# Altium PCB LedMatrix.PcbDoc (part 1 of 3)
Units mm, origin at the board's own origin, x right, y up, seen from the top; angles counter-clockwise.
Board outline 35.93 x 53 mm, 2 copper layers (Top Layer, Bottom Layer), stack 1.611 mm thick; 215 components, 212 nets, 670 pads, 259 vias.
Unrouted connection lines stored in the file: 107.
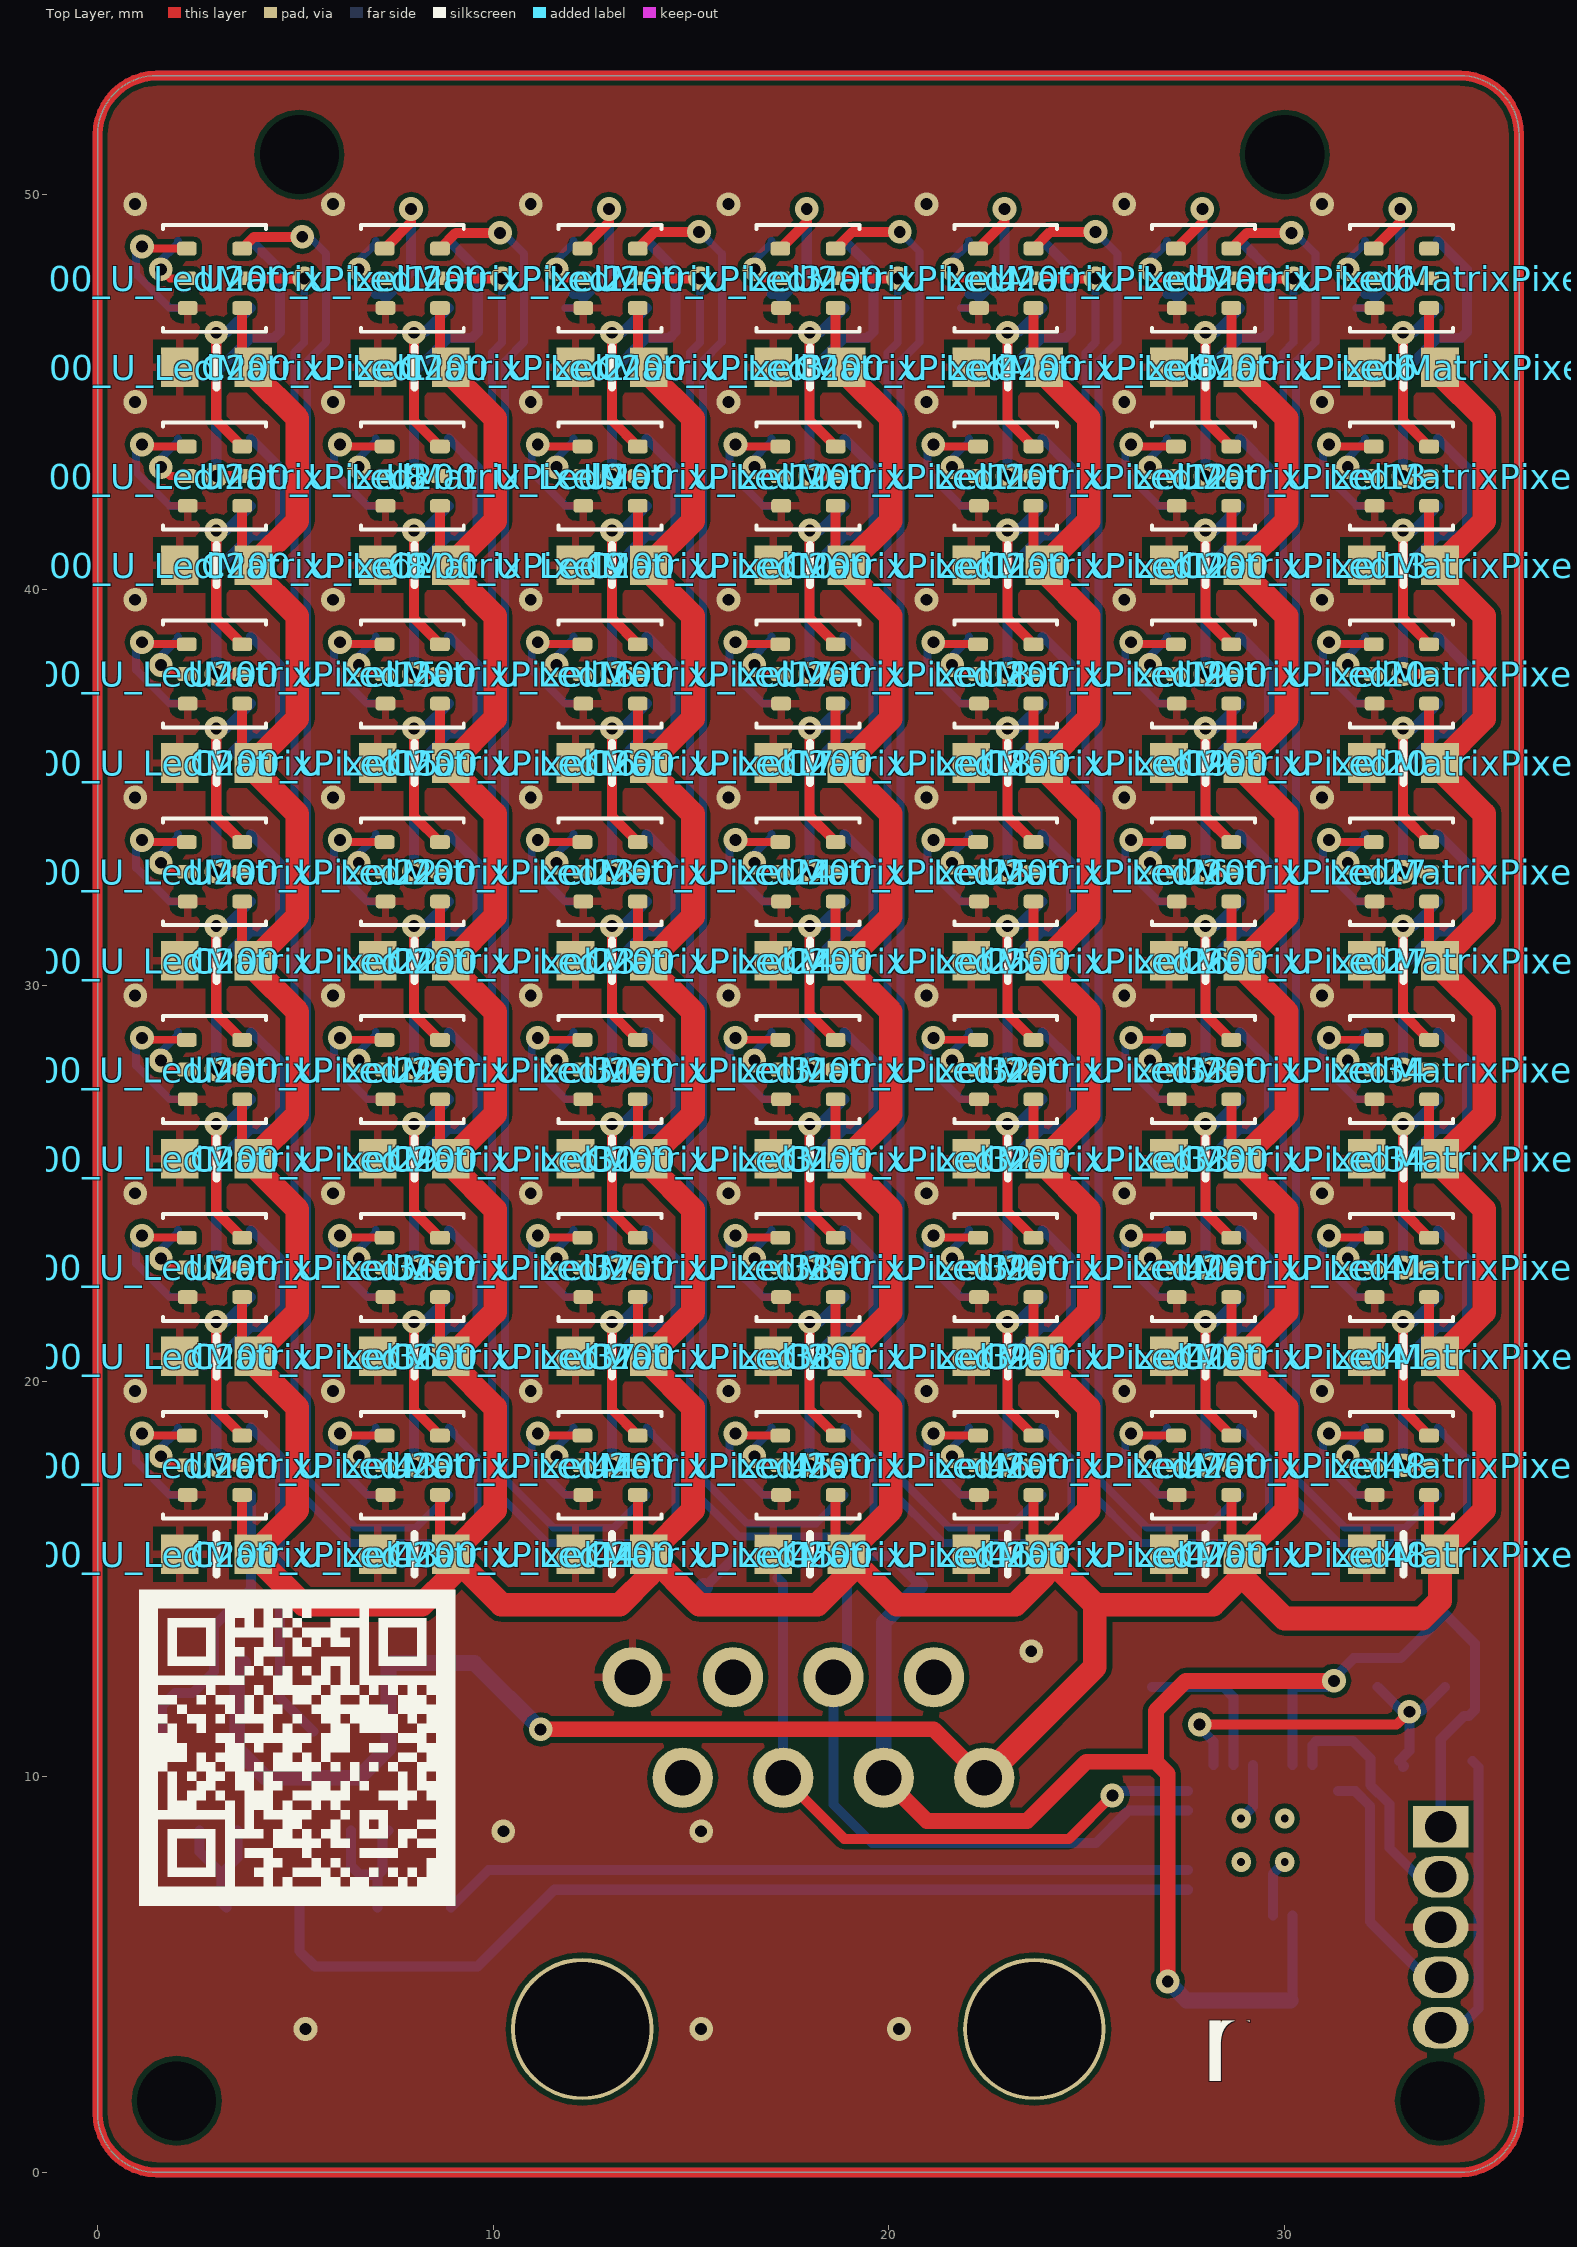
[diagram p0: Top Layer view]
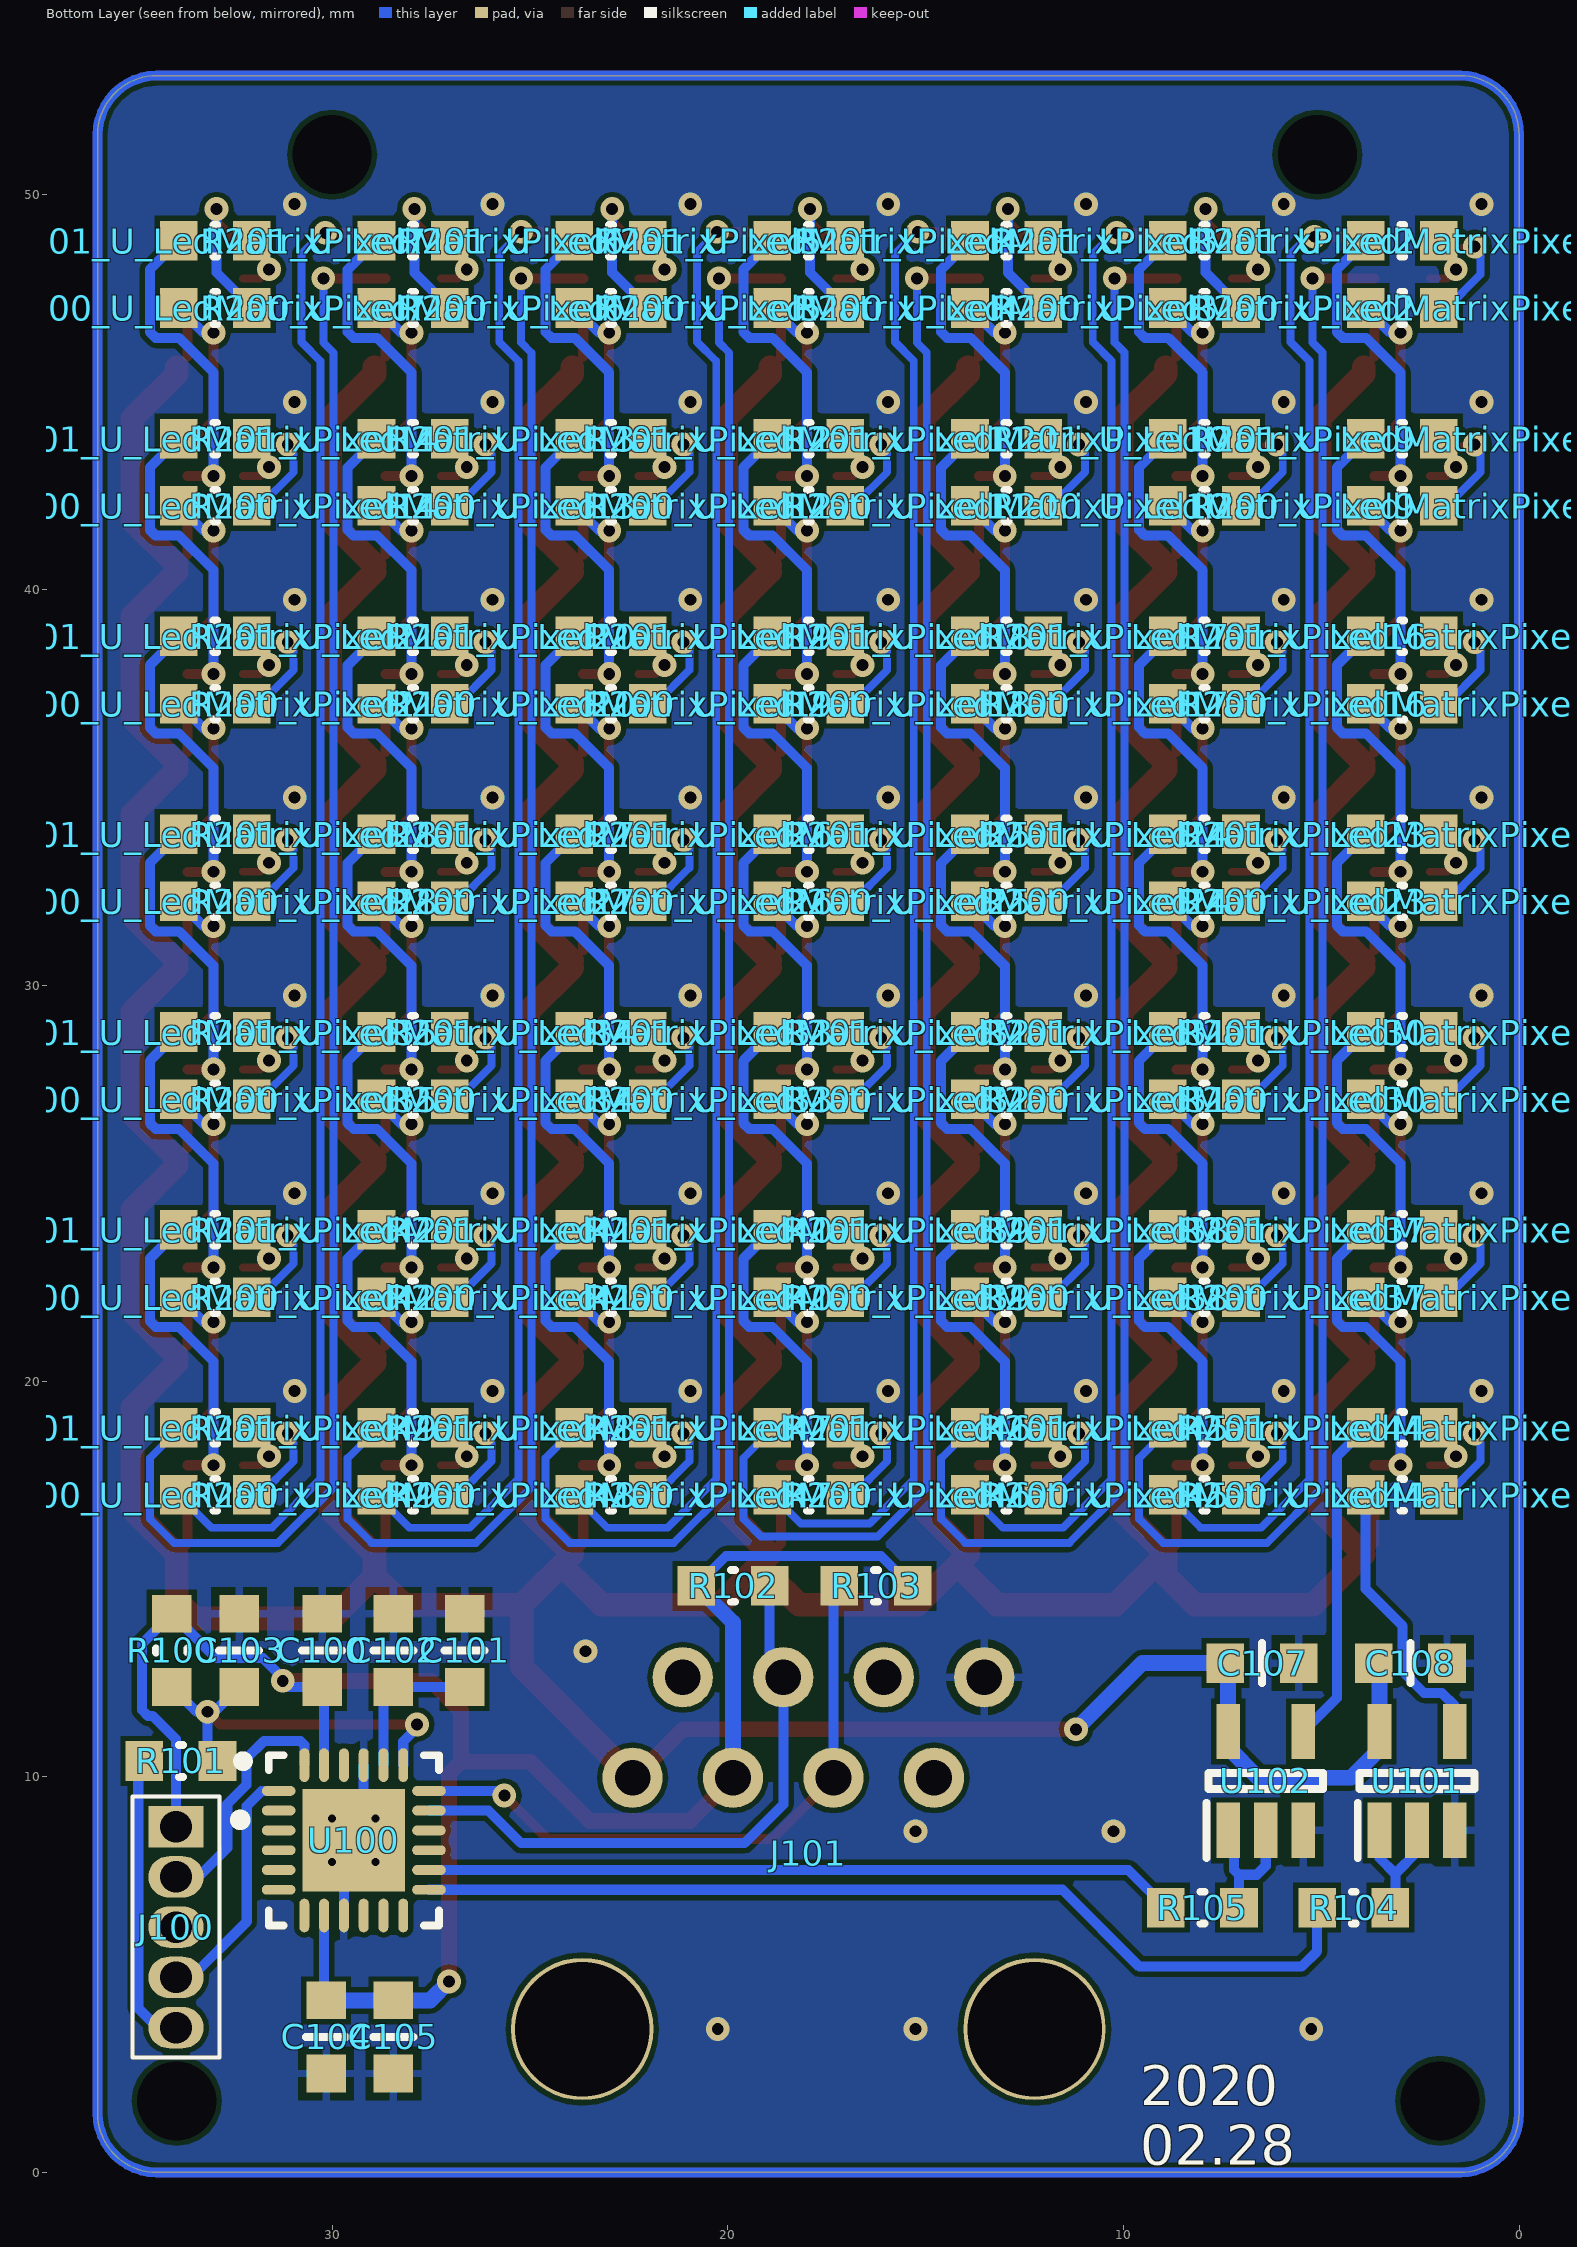
[diagram p1: Bottom Layer view, seen from below]

## Layer stack, top to bottom
Top Solder: solder mask 0.0102, Solder Resist, Dk 3.5
Top Layer: signal copper 0.0356
Dielectric 1: dielectric 1.54, FR-4, Dk 4.8
Bottom Layer: signal copper 0.0356
Bottom Solder: solder mask 0.0102, Solder Resist, Dk 3.5

## Board outline
0,1.5 ccw(c1.5,1.5) 1.5,0 34.407,0 34.432,0 ccw(c34.432,1.5) 35.933,1.5 35.931,1.5 35.931,51.5 ccw(c34.431,51.5) 34.431,53 34.425,53 1.5,53 ccw(c1.5,51.5) 0,51.5

## Design rules (kind name [scope] priority, off if disabled: settings)
Clearance [All] p1: gap=0.127 ignorepadtopadclearanceinfootprint=FALSE
PolygonConnect PolygonConnect_1 [All vs IsVia] p1: connectstyle=Direct reliefconductorwidth=0.254 reliefentries=4 polygonreliefangle="90 Angle" airgapwidth=0.254
PolygonConnect [All] p2: connectstyle=Relief reliefconductorwidth=0.2 reliefentries=4 polygonreliefangle="90 Angle" airgapwidth=0.2
RoutingVias [All] p1: holewidth=0.3 width=0.6 viastyle="Through Hole" minholewidth=0.3 minwidth=0.6 maxholewidth=2 maxwidth=2.5
SolderMaskExpansion [All] p1: expansion=0.102
Width [All] p1: maxlimit=12.7 minlimit=0.127 preferedwidth=0.254
30 further rules are at their usual default settings.

## Classes and differential pairs
channel class LedMatrixPixel: U_LedMatrixPixel1 U_LedMatrixPixel2 U_LedMatrixPixel3 U_LedMatrixPixel4 U_LedMatrixPixel5 U_LedMatrixPixel6 U_LedMatrixPixel7 U_LedMatrixPixel8 U_LedMatrixPixel9 U_LedMatrixPixel10 U_LedMatrixPixel11 U_LedMatrixPixel12 U_LedMatrixPixel13 U_LedMatrixPixel14 U_LedMatrixPixel15 U_LedMatrixPixel16 U_LedMatrixPixel17 U_LedMatrixPixel18 U_LedMatrixPixel19 U_LedMatrixPixel20 U_LedMatrixPixel21 U_LedMatrixPixel22 U_LedMatrixPixel23 U_LedMatrixPixel24 U_LedMatrixPixel25 U_LedMatrixPixel26 U_LedMatrixPixel27 U_LedMatrixPixel28 U_LedMatrixPixel29 U_LedMatrixPixel30 U_LedMatrixPixel31 U_LedMatrixPixel32 U_LedMatrixPixel33 U_LedMatrixPixel34 U_LedMatrixPixel35 U_LedMatrixPixel36 U_LedMatrixPixel37 U_LedMatrixPixel38 U_LedMatrixPixel39 U_LedMatrixPixel40 U_LedMatrixPixel41 U_LedMatrixPixel42 U_LedMatrixPixel43 U_LedMatrixPixel44 U_LedMatrixPixel45 U_LedMatrixPixel46 U_LedMatrixPixel47 U_LedMatrixPixel48 U_LedMatrixPixel49 U_LedMatrixPixel50 U_LedMatrixPixel51 U_LedMatrixPixel52 U_LedMatrixPixel54 U_LedMatrixPixel55 U_LedMatrixPixel56 U_LedMatrixPixel57 U_LedMatrixPixel58 U_LedMatrixPixel59 U_LedMatrixPixel60 U_LedMatrixPixel61 U_LedMatrixPixel63 U_LedMatrixPixel64
component class U_LedMatrixPixel48: C200_U_LedMatrixPixel48 R200_U_LedMatrixPixel48 R201_U_LedMatrixPixel48 U200_U_LedMatrixPixel48
component class U_LedMatrixPixel40: C200_U_LedMatrixPixel40 R200_U_LedMatrixPixel40 R201_U_LedMatrixPixel40 U200_U_LedMatrixPixel40
component class U_LedMatrixPixel49: C200_U_LedMatrixPixel49 R200_U_LedMatrixPixel49 R201_U_LedMatrixPixel49 U200_U_LedMatrixPixel49
component class U_LedMatrixPixel47: C200_U_LedMatrixPixel47 R200_U_LedMatrixPixel47 R201_U_LedMatrixPixel47 U200_U_LedMatrixPixel47
component class U_LedMatrixPixel46: C200_U_LedMatrixPixel46 R200_U_LedMatrixPixel46 R201_U_LedMatrixPixel46 U200_U_LedMatrixPixel46
component class U_LedMatrixPixel45: C200_U_LedMatrixPixel45 R200_U_LedMatrixPixel45 R201_U_LedMatrixPixel45 U200_U_LedMatrixPixel45
component class U_LedMatrixPixel44: C200_U_LedMatrixPixel44 R200_U_LedMatrixPixel44 R201_U_LedMatrixPixel44 U200_U_LedMatrixPixel44
component class U_LedMatrixPixel43: C200_U_LedMatrixPixel43 R200_U_LedMatrixPixel43 R201_U_LedMatrixPixel43 U200_U_LedMatrixPixel43
component class U_LedMatrixPixel42: C200_U_LedMatrixPixel42 R200_U_LedMatrixPixel42 R201_U_LedMatrixPixel42 U200_U_LedMatrixPixel42
component class U_LedMatrixPixel41: C200_U_LedMatrixPixel41 R200_U_LedMatrixPixel41 R201_U_LedMatrixPixel41 U200_U_LedMatrixPixel41
component class U_LedMatrixPixel39: C200_U_LedMatrixPixel39 R200_U_LedMatrixPixel39 R201_U_LedMatrixPixel39 U200_U_LedMatrixPixel39
component class U_LedMatrixPixel38: C200_U_LedMatrixPixel38 R200_U_LedMatrixPixel38 R201_U_LedMatrixPixel38 U200_U_LedMatrixPixel38
component class U_LedMatrixPixel37: C200_U_LedMatrixPixel37 R200_U_LedMatrixPixel37 R201_U_LedMatrixPixel37 U200_U_LedMatrixPixel37
component class U_LedMatrixPixel36: C200_U_LedMatrixPixel36 R200_U_LedMatrixPixel36 R201_U_LedMatrixPixel36 U200_U_LedMatrixPixel36
component class U_LedMatrixPixel35: C200_U_LedMatrixPixel35 R200_U_LedMatrixPixel35 R201_U_LedMatrixPixel35 U200_U_LedMatrixPixel35
component class U_LedMatrixPixel34: C200_U_LedMatrixPixel34 R200_U_LedMatrixPixel34 R201_U_LedMatrixPixel34 U200_U_LedMatrixPixel34
component class U_LedMatrixPixel33: C200_U_LedMatrixPixel33 R200_U_LedMatrixPixel33 R201_U_LedMatrixPixel33 U200_U_LedMatrixPixel33
component class U_LedMatrixPixel32: C200_U_LedMatrixPixel32 R200_U_LedMatrixPixel32 R201_U_LedMatrixPixel32 U200_U_LedMatrixPixel32
component class U_LedMatrixPixel31: C200_U_LedMatrixPixel31 R200_U_LedMatrixPixel31 R201_U_LedMatrixPixel31 U200_U_LedMatrixPixel31
component class U_LedMatrixPixel30: C200_U_LedMatrixPixel30 R200_U_LedMatrixPixel30 R201_U_LedMatrixPixel30 U200_U_LedMatrixPixel30
component class U_LedMatrixPixel29: C200_U_LedMatrixPixel29 R200_U_LedMatrixPixel29 R201_U_LedMatrixPixel29 U200_U_LedMatrixPixel29
component class U_LedMatrixPixel28: C200_U_LedMatrixPixel28 R200_U_LedMatrixPixel28 R201_U_LedMatrixPixel28 U200_U_LedMatrixPixel28
component class U_LedMatrixPixel27: C200_U_LedMatrixPixel27 R200_U_LedMatrixPixel27 R201_U_LedMatrixPixel27 U200_U_LedMatrixPixel27
component class U_LedMatrixPixel26: C200_U_LedMatrixPixel26 R200_U_LedMatrixPixel26 R201_U_LedMatrixPixel26 U200_U_LedMatrixPixel26
component class U_LedMatrixPixel25: C200_U_LedMatrixPixel25 R200_U_LedMatrixPixel25 R201_U_LedMatrixPixel25 U200_U_LedMatrixPixel25
component class U_LedMatrixPixel24: C200_U_LedMatrixPixel24 R200_U_LedMatrixPixel24 R201_U_LedMatrixPixel24 U200_U_LedMatrixPixel24
component class U_LedMatrixPixel23: C200_U_LedMatrixPixel23 R200_U_LedMatrixPixel23 R201_U_LedMatrixPixel23 U200_U_LedMatrixPixel23
component class U_LedMatrixPixel22: C200_U_LedMatrixPixel22 R200_U_LedMatrixPixel22 R201_U_LedMatrixPixel22 U200_U_LedMatrixPixel22
component class U_LedMatrixPixel21: C200_U_LedMatrixPixel21 R200_U_LedMatrixPixel21 R201_U_LedMatrixPixel21 U200_U_LedMatrixPixel21
component class U_LedMatrixPixel20: C200_U_LedMatrixPixel20 R200_U_LedMatrixPixel20 R201_U_LedMatrixPixel20 U200_U_LedMatrixPixel20
component class U_LedMatrixPixel19: C200_U_LedMatrixPixel19 R200_U_LedMatrixPixel19 R201_U_LedMatrixPixel19 U200_U_LedMatrixPixel19
component class U_LedMatrixPixel18: C200_U_LedMatrixPixel18 R200_U_LedMatrixPixel18 R201_U_LedMatrixPixel18 U200_U_LedMatrixPixel18
component class U_LedMatrixPixel17: C200_U_LedMatrixPixel17 R200_U_LedMatrixPixel17 R201_U_LedMatrixPixel17 U200_U_LedMatrixPixel17
component class U_LedMatrixPixel16: C200_U_LedMatrixPixel16 R200_U_LedMatrixPixel16 R201_U_LedMatrixPixel16 U200_U_LedMatrixPixel16
component class U_LedMatrixPixel15: C200_U_LedMatrixPixel15 R200_U_LedMatrixPixel15 R201_U_LedMatrixPixel15 U200_U_LedMatrixPixel15
component class U_LedMatrixPixel14: C200_U_LedMatrixPixel14 R200_U_LedMatrixPixel14 R201_U_LedMatrixPixel14 U200_U_LedMatrixPixel14
component class U_LedMatrixPixel13: C200_U_LedMatrixPixel13 R200_U_LedMatrixPixel13 R201_U_LedMatrixPixel13 U200_U_LedMatrixPixel13
component class U_LedMatrixPixel12: C200_U_LedMatrixPixel12 R200_U_LedMatrixPixel12 R201_U_LedMatrixPixel12 U200_U_LedMatrixPixel12
component class U_LedMatrixPixel11: C200_U_LedMatrixPixel11 R200_U_LedMatrixPixel11 R201_U_LedMatrixPixel11 U200_U_LedMatrixPixel11
component class U_LedMatrixPixel10: C200_U_LedMatrixPixel10 R200_U_LedMatrixPixel10 R201_U_LedMatrixPixel10 U200_U_LedMatrixPixel10
component class U_LedMatrixPixel9: C200_U_LedMatrixPixel9 R200_U_LedMatrixPixel9 R201_U_LedMatrixPixel9 U200_U_LedMatrixPixel9
component class U_LedMatrixPixel8: C200_U_LedMatrixPixel8 R200_U_LedMatrixPixel8 R201_U_LedMatrixPixel8 U200_U_LedMatrixPixel8
component class U_LedMatrixPixel7: C200_U_LedMatrixPixel7 R200_U_LedMatrixPixel7 R201_U_LedMatrixPixel7 U200_U_LedMatrixPixel7
component class U_LedMatrixPixel6: C200_U_LedMatrixPixel6 R200_U_LedMatrixPixel6 R201_U_LedMatrixPixel6 U200_U_LedMatrixPixel6
component class U_LedMatrixPixel5: C200_U_LedMatrixPixel5 R200_U_LedMatrixPixel5 R201_U_LedMatrixPixel5 U200_U_LedMatrixPixel5
component class U_LedMatrixPixel4: C200_U_LedMatrixPixel4 R200_U_LedMatrixPixel4 R201_U_LedMatrixPixel4 U200_U_LedMatrixPixel4
component class U_LedMatrixPixel3: C200_U_LedMatrixPixel3 R200_U_LedMatrixPixel3 R201_U_LedMatrixPixel3 U200_U_LedMatrixPixel3
component class U_LedMatrixPixel2: C200_U_LedMatrixPixel2 R200_U_LedMatrixPixel2 R201_U_LedMatrixPixel2 U200_U_LedMatrixPixel2
component class U_LedMatrixPixel1: C200_U_LedMatrixPixel1 R200_U_LedMatrixPixel1 R201_U_LedMatrixPixel1 U200_U_LedMatrixPixel1
component class LedMatrixMain: C100 C101 C102 C103 C104 C105 C107 C108 J100 J101 R100 R101 R102 R103 R104 R105 U100 U101 U102

## Components (designator, comment, footprint, x,y, rotation, side; value= is the part's Value field where it differs from the comment)
C100 "100nF" CAP1608X06M 30.256,13.195 r270 bottom
C101 "100nF" CAP1608X06M 26.656,13.195 r270 bottom
C102 "1uF" CAP1608X06M 28.456,13.195 r270 bottom
C103 "100nF" CAP1608X06M 32.356,13.195 r270 bottom
C104 "100nF" CAP1608X06M 30.156,3.425 r90 bottom
C105 "10uF" CAP1608X06M 28.456,3.425 r90 bottom
C107 "100nF" CAP1608X06M 6.5,12.875 r0 bottom
C108 "100nF" CAP1608X06M 2.75,12.875 r0 bottom
C200_U_LedMatrixPixel1 "100nF" CAP1608X06M 3.006,45.625 r0 top (schematic designator C200)
C200_U_LedMatrixPixel2 "100nF" CAP1608X06M 8.006,45.625 r0 top (schematic designator C200)
C200_U_LedMatrixPixel3 "100nF" CAP1608X06M 13.006,45.625 r0 top (schematic designator C200)
C200_U_LedMatrixPixel4 "100nF" CAP1608X06M 18.006,45.625 r0 top (schematic designator C200)
C200_U_LedMatrixPixel5 "100nF" CAP1608X06M 23.006,45.625 r0 top (schematic designator C200)
C200_U_LedMatrixPixel6 "100nF" CAP1608X06M 28.006,45.625 r0 top (schematic designator C200)
C200_U_LedMatrixPixel7 "100nF" CAP1608X06M 33.006,45.625 r0 top (schematic designator C200)
C200_U_LedMatrixPixel8 "100nF" CAP1608X06M 3.006,40.625 r0 top (schematic designator C200)
C200_U_LedMatrixPixel9 "100nF" CAP1608X06M 8.006,40.625 r0 top (schematic designator C200)
C200_U_LedMatrixPixel10 "100nF" CAP1608X06M 13.006,40.625 r0 top (schematic designator C200)
C200_U_LedMatrixPixel11 "100nF" CAP1608X06M 18.006,40.625 r0 top (schematic designator C200)
C200_U_LedMatrixPixel12 "100nF" CAP1608X06M 23.006,40.625 r0 top (schematic designator C200)
C200_U_LedMatrixPixel13 "100nF" CAP1608X06M 28.006,40.625 r0 top (schematic designator C200)
C200_U_LedMatrixPixel14 "100nF" CAP1608X06M 33.006,40.625 r0 top (schematic designator C200)
C200_U_LedMatrixPixel15 "100nF" CAP1608X06M 3.006,35.625 r0 top (schematic designator C200)
C200_U_LedMatrixPixel16 "100nF" CAP1608X06M 8.006,35.625 r0 top (schematic designator C200)
C200_U_LedMatrixPixel17 "100nF" CAP1608X06M 13.006,35.625 r0 top (schematic designator C200)
C200_U_LedMatrixPixel18 "100nF" CAP1608X06M 18.006,35.625 r0 top (schematic designator C200)
C200_U_LedMatrixPixel19 "100nF" CAP1608X06M 23.006,35.625 r0 top (schematic designator C200)
C200_U_LedMatrixPixel20 "100nF" CAP1608X06M 28.006,35.625 r0 top (schematic designator C200)
C200_U_LedMatrixPixel21 "100nF" CAP1608X06M 33.006,35.625 r0 top (schematic designator C200)
C200_U_LedMatrixPixel22 "100nF" CAP1608X06M 3.006,30.625 r0 top (schematic designator C200)
C200_U_LedMatrixPixel23 "100nF" CAP1608X06M 8.006,30.625 r0 top (schematic designator C200)
C200_U_LedMatrixPixel24 "100nF" CAP1608X06M 13.006,30.625 r0 top (schematic designator C200)
C200_U_LedMatrixPixel25 "100nF" CAP1608X06M 18.006,30.625 r0 top (schematic designator C200)
C200_U_LedMatrixPixel26 "100nF" CAP1608X06M 23.006,30.625 r0 top (schematic designator C200)
C200_U_LedMatrixPixel27 "100nF" CAP1608X06M 28.006,30.625 r0 top (schematic designator C200)
C200_U_LedMatrixPixel28 "100nF" CAP1608X06M 33.006,30.625 r0 top (schematic designator C200)
C200_U_LedMatrixPixel29 "100nF" CAP1608X06M 3.006,25.625 r0 top (schematic designator C200)
C200_U_LedMatrixPixel30 "100nF" CAP1608X06M 8.006,25.625 r0 top (schematic designator C200)
C200_U_LedMatrixPixel31 "100nF" CAP1608X06M 13.006,25.625 r0 top (schematic designator C200)
C200_U_LedMatrixPixel32 "100nF" CAP1608X06M 18.006,25.625 r0 top (schematic designator C200)
C200_U_LedMatrixPixel33 "100nF" CAP1608X06M 23.006,25.625 r0 top (schematic designator C200)
C200_U_LedMatrixPixel34 "100nF" CAP1608X06M 28.006,25.625 r0 top (schematic designator C200)
C200_U_LedMatrixPixel35 "100nF" CAP1608X06M 33.006,25.625 r0 top (schematic designator C200)
C200_U_LedMatrixPixel36 "100nF" CAP1608X06M 3.006,20.625 r0 top (schematic designator C200)
C200_U_LedMatrixPixel37 "100nF" CAP1608X06M 8.006,20.625 r0 top (schematic designator C200)
C200_U_LedMatrixPixel38 "100nF" CAP1608X06M 13.006,20.625 r0 top (schematic designator C200)
C200_U_LedMatrixPixel39 "100nF" CAP1608X06M 18.006,20.625 r0 top (schematic designator C200)
C200_U_LedMatrixPixel40 "100nF" CAP1608X06M 23.006,20.625 r0 top (schematic designator C200)
C200_U_LedMatrixPixel41 "100nF" CAP1608X06M 28.006,20.625 r0 top (schematic designator C200)
C200_U_LedMatrixPixel42 "100nF" CAP1608X06M 33.006,20.625 r0 top (schematic designator C200)
C200_U_LedMatrixPixel43 "100nF" CAP1608X06M 3.006,15.625 r0 top (schematic designator C200)
C200_U_LedMatrixPixel44 "100nF" CAP1608X06M 8.006,15.625 r0 top (schematic designator C200)
C200_U_LedMatrixPixel45 "100nF" CAP1608X06M 13.006,15.625 r0 top (schematic designator C200)
C200_U_LedMatrixPixel46 "100nF" CAP1608X06M 18.006,15.625 r0 top (schematic designator C200)
C200_U_LedMatrixPixel47 "100nF" CAP1608X06M 23.006,15.625 r0 top (schematic designator C200)
C200_U_LedMatrixPixel48 "100nF" CAP1608X06M 28.006,15.625 r0 top (schematic designator C200)
C200_U_LedMatrixPixel49 "100nF" CAP1608X06M 33.006,15.625 r0 top (schematic designator C200)
J100 "SWD" Sullins_GRPB051VWVN-RC 33.95,6.2 r270 bottom
J101 "RJ45-8P8C-S" RJ45-8P8C 22.41,9.975 r180 bottom
R100 "10K" RESC1608X06M 34.056,13.195 r90 bottom
R101 "100" RESC1608X06M 33.825,10.4 r180 bottom
R102 "10K" RESC1608X06M 19.87,14.825 r0 bottom
R103 "10K" RESC1608X06M 16.256,14.825 r180 bottom
R104 "100" RESC1608X06M 4.181,6.695 r180 bottom
R105 "100" RESC1608X06M 8.006,6.695 r180 bottom
R200_U_LedMatrixPixel1 "100" RESC1608X06M 2.956,47.125 r180 bottom (schematic designator R200)
R200_U_LedMatrixPixel2 "100" RESC1608X06M 7.956,47.125 r180 bottom (schematic designator R200)
R200_U_LedMatrixPixel3 "100" RESC1608X06M 12.956,47.125 r180 bottom (schematic designator R200)
R200_U_LedMatrixPixel4 "100" RESC1608X06M 17.956,47.125 r180 bottom (schematic designator R200)
R200_U_LedMatrixPixel5 "100" RESC1608X06M 22.956,47.125 r180 bottom (schematic designator R200)
R200_U_LedMatrixPixel6 "100" RESC1608X06M 27.956,47.125 r180 bottom (schematic designator R200)
R200_U_LedMatrixPixel7 "100" RESC1608X06M 32.956,47.125 r180 bottom (schematic designator R200)
R200_U_LedMatrixPixel8 "100" RESC1608X06M 2.956,42.125 r180 bottom (schematic designator R200)
R200_U_LedMatrixPixel9 "100" RESC1608X06M 7.956,42.125 r180 bottom (schematic designator R200)
R200_U_LedMatrixPixel10 "100" RESC1608X06M 12.956,42.125 r180 bottom (schematic designator R200)
R200_U_LedMatrixPixel11 "100" RESC1608X06M 17.956,42.125 r180 bottom (schematic designator R200)
R200_U_LedMatrixPixel12 "100" RESC1608X06M 22.956,42.125 r180 bottom (schematic designator R200)
R200_U_LedMatrixPixel13 "100" RESC1608X06M 27.956,42.125 r180 bottom (schematic designator R200)
R200_U_LedMatrixPixel14 "100" RESC1608X06M 32.956,42.125 r180 bottom (schematic designator R200)
R200_U_LedMatrixPixel15 "100" RESC1608X06M 2.956,37.125 r180 bottom (schematic designator R200)
R200_U_LedMatrixPixel16 "100" RESC1608X06M 7.956,37.125 r180 bottom (schematic designator R200)
R200_U_LedMatrixPixel17 "100" RESC1608X06M 12.956,37.125 r180 bottom (schematic designator R200)
R200_U_LedMatrixPixel18 "100" RESC1608X06M 17.956,37.125 r180 bottom (schematic designator R200)
R200_U_LedMatrixPixel19 "100" RESC1608X06M 22.956,37.125 r180 bottom (schematic designator R200)
R200_U_LedMatrixPixel20 "100" RESC1608X06M 27.956,37.125 r180 bottom (schematic designator R200)
R200_U_LedMatrixPixel21 "100" RESC1608X06M 32.956,37.125 r180 bottom (schematic designator R200)
R200_U_LedMatrixPixel22 "100" RESC1608X06M 2.956,32.125 r180 bottom (schematic designator R200)
R200_U_LedMatrixPixel23 "100" RESC1608X06M 7.956,32.125 r180 bottom (schematic designator R200)
R200_U_LedMatrixPixel24 "100" RESC1608X06M 12.956,32.125 r180 bottom (schematic designator R200)
R200_U_LedMatrixPixel25 "100" RESC1608X06M 17.956,32.125 r180 bottom (schematic designator R200)
R200_U_LedMatrixPixel26 "100" RESC1608X06M 22.956,32.125 r180 bottom (schematic designator R200)
R200_U_LedMatrixPixel27 "100" RESC1608X06M 27.956,32.125 r180 bottom (schematic designator R200)
R200_U_LedMatrixPixel28 "100" RESC1608X06M 32.956,32.125 r180 bottom (schematic designator R200)
R200_U_LedMatrixPixel29 "100" RESC1608X06M 2.956,27.125 r180 bottom (schematic designator R200)
R200_U_LedMatrixPixel30 "100" RESC1608X06M 7.956,27.125 r180 bottom (schematic designator R200)
R200_U_LedMatrixPixel31 "100" RESC1608X06M 12.956,27.125 r180 bottom (schematic designator R200)
R200_U_LedMatrixPixel32 "100" RESC1608X06M 17.956,27.125 r180 bottom (schematic designator R200)
R200_U_LedMatrixPixel33 "100" RESC1608X06M 22.956,27.125 r180 bottom (schematic designator R200)
R200_U_LedMatrixPixel34 "100" RESC1608X06M 27.956,27.125 r180 bottom (schematic designator R200)
R200_U_LedMatrixPixel35 "100" RESC1608X06M 32.956,27.125 r180 bottom (schematic designator R200)
R200_U_LedMatrixPixel36 "100" RESC1608X06M 2.956,22.125 r180 bottom (schematic designator R200)
R200_U_LedMatrixPixel37 "100" RESC1608X06M 7.956,22.125 r180 bottom (schematic designator R200)
R200_U_LedMatrixPixel38 "100" RESC1608X06M 12.956,22.125 r180 bottom (schematic designator R200)
R200_U_LedMatrixPixel39 "100" RESC1608X06M 17.956,22.125 r180 bottom (schematic designator R200)
R200_U_LedMatrixPixel40 "100" RESC1608X06M 22.956,22.125 r180 bottom (schematic designator R200)
R200_U_LedMatrixPixel41 "100" RESC1608X06M 27.956,22.125 r180 bottom (schematic designator R200)
R200_U_LedMatrixPixel42 "100" RESC1608X06M 32.956,22.125 r180 bottom (schematic designator R200)
R200_U_LedMatrixPixel43 "100" RESC1608X06M 2.956,17.125 r180 bottom (schematic designator R200)
R200_U_LedMatrixPixel44 "100" RESC1608X06M 7.956,17.125 r180 bottom (schematic designator R200)
R200_U_LedMatrixPixel45 "100" RESC1608X06M 12.956,17.125 r180 bottom (schematic designator R200)
R200_U_LedMatrixPixel46 "100" RESC1608X06M 17.956,17.125 r180 bottom (schematic designator R200)
R200_U_LedMatrixPixel47 "100" RESC1608X06M 22.956,17.125 r180 bottom (schematic designator R200)
R200_U_LedMatrixPixel48 "100" RESC1608X06M 27.956,17.125 r180 bottom (schematic designator R200)
R200_U_LedMatrixPixel49 "100" RESC1608X06M 32.956,17.125 r180 bottom (schematic designator R200)
R201_U_LedMatrixPixel1 "100" RESC1608X06M 2.956,48.825 r180 bottom (schematic designator R201)
R201_U_LedMatrixPixel2 "100" RESC1608X06M 7.956,48.825 r180 bottom (schematic designator R201)
R201_U_LedMatrixPixel3 "100" RESC1608X06M 12.956,48.825 r180 bottom (schematic designator R201)
R201_U_LedMatrixPixel4 "100" RESC1608X06M 17.956,48.825 r180 bottom (schematic designator R201)
R201_U_LedMatrixPixel5 "100" RESC1608X06M 22.956,48.825 r180 bottom (schematic designator R201)
R201_U_LedMatrixPixel6 "100" RESC1608X06M 27.956,48.825 r180 bottom (schematic designator R201)
R201_U_LedMatrixPixel7 "100" RESC1608X06M 32.956,48.825 r180 bottom (schematic designator R201)
R201_U_LedMatrixPixel8 "100" RESC1608X06M 2.956,43.825 r180 bottom (schematic designator R201)
R201_U_LedMatrixPixel9 "100" RESC1608X06M 7.956,43.825 r180 bottom (schematic designator R201)
R201_U_LedMatrixPixel10 "100" RESC1608X06M 12.956,43.825 r180 bottom (schematic designator R201)
R201_U_LedMatrixPixel11 "100" RESC1608X06M 17.956,43.825 r180 bottom (schematic designator R201)
R201_U_LedMatrixPixel12 "100" RESC1608X06M 22.956,43.825 r180 bottom (schematic designator R201)
R201_U_LedMatrixPixel13 "100" RESC1608X06M 27.956,43.825 r180 bottom (schematic designator R201)
R201_U_LedMatrixPixel14 "100" RESC1608X06M 32.956,43.825 r180 bottom (schematic designator R201)
R201_U_LedMatrixPixel15 "100" RESC1608X06M 2.956,38.825 r180 bottom (schematic designator R201)
R201_U_LedMatrixPixel16 "100" RESC1608X06M 7.956,38.825 r180 bottom (schematic designator R201)
R201_U_LedMatrixPixel17 "100" RESC1608X06M 12.956,38.825 r180 bottom (schematic designator R201)
R201_U_LedMatrixPixel18 "100" RESC1608X06M 17.956,38.825 r180 bottom (schematic designator R201)
R201_U_LedMatrixPixel19 "100" RESC1608X06M 22.956,38.825 r180 bottom (schematic designator R201)
R201_U_LedMatrixPixel20 "100" RESC1608X06M 27.956,38.825 r180 bottom (schematic designator R201)
R201_U_LedMatrixPixel21 "100" RESC1608X06M 32.956,38.825 r180 bottom (schematic designator R201)
R201_U_LedMatrixPixel22 "100" RESC1608X06M 2.956,33.825 r180 bottom (schematic designator R201)
R201_U_LedMatrixPixel23 "100" RESC1608X06M 7.956,33.825 r180 bottom (schematic designator R201)
R201_U_LedMatrixPixel24 "100" RESC1608X06M 12.956,33.825 r180 bottom (schematic designator R201)
R201_U_LedMatrixPixel25 "100" RESC1608X06M 17.956,33.825 r180 bottom (schematic designator R201)
R201_U_LedMatrixPixel26 "100" RESC1608X06M 22.956,33.825 r180 bottom (schematic designator R201)
R201_U_LedMatrixPixel27 "100" RESC1608X06M 27.956,33.825 r180 bottom (schematic designator R201)
R201_U_LedMatrixPixel28 "100" RESC1608X06M 32.956,33.825 r180 bottom (schematic designator R201)
R201_U_LedMatrixPixel29 "100" RESC1608X06M 2.956,28.825 r180 bottom (schematic designator R201)
R201_U_LedMatrixPixel30 "100" RESC1608X06M 7.956,28.825 r180 bottom (schematic designator R201)
R201_U_LedMatrixPixel31 "100" RESC1608X06M 12.956,28.825 r180 bottom (schematic designator R201)
R201_U_LedMatrixPixel32 "100" RESC1608X06M 17.956,28.825 r180 bottom (schematic designator R201)
R201_U_LedMatrixPixel33 "100" RESC1608X06M 22.956,28.825 r180 bottom (schematic designator R201)
R201_U_LedMatrixPixel34 "100" RESC1608X06M 27.956,28.825 r180 bottom (schematic designator R201)
R201_U_LedMatrixPixel35 "100" RESC1608X06M 32.956,28.825 r180 bottom (schematic designator R201)
R201_U_LedMatrixPixel36 "100" RESC1608X06M 2.956,23.825 r180 bottom (schematic designator R201)
R201_U_LedMatrixPixel37 "100" RESC1608X06M 7.956,23.825 r180 bottom (schematic designator R201)
R201_U_LedMatrixPixel38 "100" RESC1608X06M 12.956,23.825 r180 bottom (schematic designator R201)
R201_U_LedMatrixPixel39 "100" RESC1608X06M 17.956,23.825 r180 bottom (schematic designator R201)
R201_U_LedMatrixPixel40 "100" RESC1608X06M 22.956,23.825 r180 bottom (schematic designator R201)
R201_U_LedMatrixPixel41 "100" RESC1608X06M 27.956,23.825 r180 bottom (schematic designator R201)
R201_U_LedMatrixPixel42 "100" RESC1608X06M 32.956,23.825 r180 bottom (schematic designator R201)
R201_U_LedMatrixPixel43 "100" RESC1608X06M 2.956,18.825 r180 bottom (schematic designator R201)
R201_U_LedMatrixPixel44 "100" RESC1608X06M 7.956,18.825 r180 bottom (schematic designator R201)
R201_U_LedMatrixPixel45 "100" RESC1608X06M 12.956,18.825 r180 bottom (schematic designator R201)
R201_U_LedMatrixPixel46 "100" RESC1608X06M 17.956,18.825 r180 bottom (schematic designator R201)
R201_U_LedMatrixPixel47 "100" RESC1608X06M 22.956,18.825 r180 bottom (schematic designator R201)
R201_U_LedMatrixPixel48 "100" RESC1608X06M 27.956,18.825 r180 bottom (schematic designator R201)
R201_U_LedMatrixPixel49 "100" RESC1608X06M 32.956,18.825 r180 bottom (schematic designator R201)
U100 "ATSAML10D16" QFN50P400X400X90_HS-25N 29.456,8.395 r180 bottom
U101 "OR gate" SOT95P270X145-5N 2.581,9.895 r90 bottom
U102 "OR gate" SOT95P270X145-5N 6.406,9.895 r90 bottom
U200_U_LedMatrixPixel1 "APA102-2020" APA102 2.256,48.625 r0 top locked (schematic designator U200)
U200_U_LedMatrixPixel2 "APA102-2020" APA102 7.256,48.625 r0 top locked (schematic designator U200)
U200_U_LedMatrixPixel3 "APA102-2020" APA102 12.256,48.625 r0 top locked (schematic designator U200)
U200_U_LedMatrixPixel4 "APA102-2020" APA102 17.256,48.625 r0 top locked (schematic designator U200)
U200_U_LedMatrixPixel5 "APA102-2020" APA102 22.256,48.625 r0 top locked (schematic designator U200)
U200_U_LedMatrixPixel6 "APA102-2020" APA102 27.256,48.625 r0 top locked (schematic designator U200)
U200_U_LedMatrixPixel7 "APA102-2020" APA102 32.256,48.625 r0 top (schematic designator U200)
U200_U_LedMatrixPixel8 "APA102-2020" APA102 2.256,43.625 r0 top locked (schematic designator U200)
U200_U_LedMatrixPixel9 "APA102-2020" APA102 7.256,43.625 r0 top locked (schematic designator U200)
U200_U_LedMatrixPixel10 "APA102-2020" APA102 12.256,43.625 r0 top locked (schematic designator U200)
U200_U_LedMatrixPixel11 "APA102-2020" APA102 17.256,43.625 r0 top locked (schematic designator U200)
U200_U_LedMatrixPixel12 "APA102-2020" APA102 22.256,43.625 r0 top locked (schematic designator U200)
U200_U_LedMatrixPixel13 "APA102-2020" APA102 27.256,43.625 r0 top locked (schematic designator U200)
U200_U_LedMatrixPixel14 "APA102-2020" APA102 32.256,43.625 r0 top locked (schematic designator U200)
U200_U_LedMatrixPixel15 "APA102-2020" APA102 2.256,38.625 r0 top locked (schematic designator U200)
U200_U_LedMatrixPixel16 "APA102-2020" APA102 7.256,38.625 r0 top locked (schematic designator U200)
U200_U_LedMatrixPixel17 "APA102-2020" APA102 12.256,38.625 r0 top locked (schematic designator U200)
U200_U_LedMatrixPixel18 "APA102-2020" APA102 17.256,38.625 r0 top locked (schematic designator U200)
U200_U_LedMatrixPixel19 "APA102-2020" APA102 22.256,38.625 r0 top locked (schematic designator U200)
U200_U_LedMatrixPixel20 "APA102-2020" APA102 27.256,38.625 r0 top locked (schematic designator U200)
U200_U_LedMatrixPixel21 "APA102-2020" APA102 32.256,38.625 r0 top locked (schematic designator U200)
U200_U_LedMatrixPixel22 "APA102-2020" APA102 2.256,33.625 r0 top locked (schematic designator U200)
U200_U_LedMatrixPixel23 "APA102-2020" APA102 7.256,33.625 r0 top locked (schematic designator U200)
U200_U_LedMatrixPixel24 "APA102-2020" APA102 12.256,33.625 r0 top locked (schematic designator U200)
U200_U_LedMatrixPixel25 "APA102-2020" APA102 17.256,33.625 r0 top locked (schematic designator U200)
U200_U_LedMatrixPixel26 "APA102-2020" APA102 22.256,33.625 r0 top locked (schematic designator U200)
U200_U_LedMatrixPixel27 "APA102-2020" APA102 27.256,33.625 r0 top locked (schematic designator U200)
U200_U_LedMatrixPixel28 "APA102-2020" APA102 32.256,33.625 r0 top locked (schematic designator U200)
U200_U_LedMatrixPixel29 "APA102-2020" APA102 2.256,28.625 r0 top locked (schematic designator U200)
U200_U_LedMatrixPixel30 "APA102-2020" APA102 7.256,28.625 r0 top locked (schematic designator U200)
U200_U_LedMatrixPixel31 "APA102-2020" APA102 12.256,28.625 r0 top locked (schematic designator U200)
U200_U_LedMatrixPixel32 "APA102-2020" APA102 17.256,28.625 r0 top locked (schematic designator U200)
U200_U_LedMatrixPixel33 "APA102-2020" APA102 22.256,28.625 r0 top locked (schematic designator U200)
U200_U_LedMatrixPixel34 "APA102-2020" APA102 27.256,28.625 r0 top locked (schematic designator U200)
U200_U_LedMatrixPixel35 "APA102-2020" APA102 32.256,28.625 r0 top locked (schematic designator U200)
U200_U_LedMatrixPixel36 "APA102-2020" APA102 2.256,23.625 r0 top locked (schematic designator U200)
U200_U_LedMatrixPixel37 "APA102-2020" APA102 7.256,23.625 r0 top locked (schematic designator U200)
U200_U_LedMatrixPixel38 "APA102-2020" APA102 12.256,23.625 r0 top locked (schematic designator U200)
U200_U_LedMatrixPixel39 "APA102-2020" APA102 17.256,23.625 r0 top locked (schematic designator U200)
U200_U_LedMatrixPixel40 "APA102-2020" APA102 22.256,23.625 r0 top locked (schematic designator U200)
U200_U_LedMatrixPixel41 "APA102-2020" APA102 27.256,23.625 r0 top locked (schematic designator U200)
U200_U_LedMatrixPixel42 "APA102-2020" APA102 32.256,23.625 r0 top locked (schematic designator U200)
U200_U_LedMatrixPixel43 "APA102-2020" APA102 2.256,18.625 r0 top locked (schematic designator U200)
U200_U_LedMatrixPixel44 "APA102-2020" APA102 7.256,18.625 r0 top locked (schematic designator U200)
U200_U_LedMatrixPixel45 "APA102-2020" APA102 12.256,18.625 r0 top locked (schematic designator U200)
U200_U_LedMatrixPixel46 "APA102-2020" APA102 17.256,18.625 r0 top locked (schematic designator U200)
U200_U_LedMatrixPixel47 "APA102-2020" APA102 22.256,18.625 r0 top locked (schematic designator U200)
U200_U_LedMatrixPixel48 "APA102-2020" APA102 27.256,18.625 r0 top locked (schematic designator U200)
U200_U_LedMatrixPixel49 "APA102-2020" APA102 32.256,18.625 r0 top locked (schematic designator U200)

## Footprints (in the part's own frame and the unit in brackets; to place one, negate y for a bottom-side part, rotate by r counter-clockwise, add the part's x,y. Pads: shape width x height; smd on the part's side, far side on the other; paste and mask are expansions set on the pad)
APA102 [mm]
  rrect45% 0.5x0.35 smd paste-0.025 mask+0.05: 1(0,0) 2(0,-0.75) 3(0.021,-1.5) 4(1.4,-1.5) 5(1.4,-0.75) 6(1.4,0)
  silkscreen extent -0.6,-2.1 2,0.6, body extent -0.3,-1.78 1.7,0.3, height 0.9
CAP1608X06M [mm] "Chip Capacitor 2-Leads, Body 1,60x0,80mm, IPC Low Density"
  rect 0.95x1 smd: 1(-0.925,0) 2(0.925,0)
  silkscreen extent 0,-0.51 0,0.51, body extent -0.85,-0.45 0.85,0.45, height 0.6
QFN50P400X400X90_HS-25N [mm] "QFN, 24-Leads, Body 4,00x4,00mm, Pitch 0,50mm, Thermal Pad 2,60x2,60mm, IPC Medium Density"
  oval 0.85x0.25 smd paste+0.05 mask+0.102: 1(-1.9,1.25) 2(-1.9,0.75) 3(-1.9,0.25) 4(-1.9,-0.25) 5(-1.9,-0.75) 6(-1.9,-1.25) 13(1.9,-1.25) 14(1.9,-0.75) 15(1.9,-0.25) 16(1.9,0.25) 17(1.9,0.75) 18(1.9,1.25)
  oval 0.25x0.85 smd paste+0.05 mask+0.102: 7(-1.25,-1.9) 8(-0.75,-1.9) 9(-0.25,-1.9) 10(0.25,-1.9) 11(0.75,-1.9) 12(1.25,-1.9) 19(1.25,1.9) 20(0.75,1.9) 21(0.25,1.9) 22(-0.25,1.9) 23(-0.75,1.9) 24(-1.25,1.9)
  rect 2.6x2.6 smd paste+0.05 mask+0.102: 25(0,0)
  silkscreen extent -2.93,-2.15 2.15,2.15, body extent -2,-2 2,2, height 0.9
RESC1608X06M [mm] "Chip Resistor, 2-Leads, Body 1,60x0,80mm, IPC Low Density"
  rect 0.95x1 smd: 1(-0.925,0) 2(0.925,0)
  silkscreen extent -0.05,-0.4 0.05,0.4, body extent -0.85,-0.45 0.85,0.45, height 0.6
RJ45-8P8C [mil]
  round 141.73 hole 133.86: 0(-50,-250) 0(400,-250)
  round 60 hole 35.43: 1(0,0) 2(50,100) 3(100,0) 4(150,100) 5(200,0) 6(250,100) 7(300,0) 8(350,100)
  body extent -136,-665 484,145, height 638
SOT95P270X145-5N [mm]
  rect 1.4x0.6 smd: 1(-1.25,0.95) 2(-1.25,0) 3(-1.25,-0.95) 4(1.25,-0.95) 5(1.25,0.95)
  silkscreen extent -1.95,-1.45 0.2,1.5, body extent -1.35,-1.45 1.35,1.45, height 1.45
Sullins_GRPB051VWVN-RC [mm]
  rect 1.05x1.4 hole 0.8 paste-2 mask+0.05: 1(-2.54,0)
  rrect100% 1.05x1.4 hole 0.8 paste-2 mask+0.05: 2(-1.27,0) 3(0,0) 4(1.27,0) 5(2.54,0)
  silkscreen extent -3.3,-1.1 3.3,1.63, body extent -3.18,-1.07 3.17,1.07, height 4

## Part data
C100 C101 C103 C104 C107 C108 C200_U_LedMatrixPixel1 C200_U_LedMatrixPixel2 C200_U_LedMatrixPixel3 C200_U_LedMatrixPixel4 C200_U_LedMatrixPixel5 C200_U_LedMatrixPixel6 C200_U_LedMatrixPixel7 C200_U_LedMatrixPixel8 C200_U_LedMatrixPixel9 C200_U_LedMatrixPixel10 C200_U_LedMatrixPixel11 C200_U_LedMatrixPixel12 C200_U_LedMatrixPixel13 C200_U_LedMatrixPixel14 C200_U_LedMatrixPixel15 C200_U_LedMatrixPixel16 C200_U_LedMatrixPixel17 C200_U_LedMatrixPixel18 C200_U_LedMatrixPixel19 C200_U_LedMatrixPixel20 C200_U_LedMatrixPixel21 C200_U_LedMatrixPixel22 C200_U_LedMatrixPixel23 C200_U_LedMatrixPixel24 C200_U_LedMatrixPixel25 C200_U_LedMatrixPixel26 C200_U_LedMatrixPixel27 C200_U_LedMatrixPixel28 C200_U_LedMatrixPixel29 C200_U_LedMatrixPixel30 C200_U_LedMatrixPixel31 C200_U_LedMatrixPixel32 C200_U_LedMatrixPixel33 C200_U_LedMatrixPixel34 C200_U_LedMatrixPixel35 C200_U_LedMatrixPixel36 C200_U_LedMatrixPixel37 C200_U_LedMatrixPixel38 C200_U_LedMatrixPixel39 C200_U_LedMatrixPixel40 C200_U_LedMatrixPixel41 C200_U_LedMatrixPixel42 C200_U_LedMatrixPixel43 C200_U_LedMatrixPixel44 C200_U_LedMatrixPixel45 C200_U_LedMatrixPixel46 C200_U_LedMatrixPixel47 C200_U_LedMatrixPixel48 C200_U_LedMatrixPixel49: library part "Capacitor 100n"
C102: library part "Capacitor 1u"
C105: library part "Capacitor 10u"
R100 R102 R103: library part "Resistor 10K"
R101 R104 R105 R200_U_LedMatrixPixel1 R200_U_LedMatrixPixel2 R200_U_LedMatrixPixel3 R200_U_LedMatrixPixel4 R200_U_LedMatrixPixel5 R200_U_LedMatrixPixel6 R200_U_LedMatrixPixel7 R200_U_LedMatrixPixel8 R200_U_LedMatrixPixel9 R200_U_LedMatrixPixel10 R200_U_LedMatrixPixel11 R200_U_LedMatrixPixel12 R200_U_LedMatrixPixel13 R200_U_LedMatrixPixel14 R200_U_LedMatrixPixel15 R200_U_LedMatrixPixel16 R200_U_LedMatrixPixel17 R200_U_LedMatrixPixel18 R200_U_LedMatrixPixel19 R200_U_LedMatrixPixel20 R200_U_LedMatrixPixel21 R200_U_LedMatrixPixel22 R200_U_LedMatrixPixel23 R200_U_LedMatrixPixel24 R200_U_LedMatrixPixel25 R200_U_LedMatrixPixel26 R200_U_LedMatrixPixel27 R200_U_LedMatrixPixel28 R200_U_LedMatrixPixel29 R200_U_LedMatrixPixel30 R200_U_LedMatrixPixel31 R200_U_LedMatrixPixel32 R200_U_LedMatrixPixel33 R200_U_LedMatrixPixel34 R200_U_LedMatrixPixel35 R200_U_LedMatrixPixel36 R200_U_LedMatrixPixel37 R200_U_LedMatrixPixel38 R200_U_LedMatrixPixel39 R200_U_LedMatrixPixel40 R200_U_LedMatrixPixel41 R200_U_LedMatrixPixel42 R200_U_LedMatrixPixel43 R200_U_LedMatrixPixel44 R200_U_LedMatrixPixel45 R200_U_LedMatrixPixel46 R200_U_LedMatrixPixel47 R200_U_LedMatrixPixel48 R200_U_LedMatrixPixel49 R201_U_LedMatrixPixel1 R201_U_LedMatrixPixel2 R201_U_LedMatrixPixel3 R201_U_LedMatrixPixel4 R201_U_LedMatrixPixel5 R201_U_LedMatrixPixel6 R201_U_LedMatrixPixel7 R201_U_LedMatrixPixel8 R201_U_LedMatrixPixel9 R201_U_LedMatrixPixel10 R201_U_LedMatrixPixel11 R201_U_LedMatrixPixel12 R201_U_LedMatrixPixel13 R201_U_LedMatrixPixel14 R201_U_LedMatrixPixel15 R201_U_LedMatrixPixel16 R201_U_LedMatrixPixel17 R201_U_LedMatrixPixel18 R201_U_LedMatrixPixel19 R201_U_LedMatrixPixel20 R201_U_LedMatrixPixel21 R201_U_LedMatrixPixel22 R201_U_LedMatrixPixel23 R201_U_LedMatrixPixel24 R201_U_LedMatrixPixel25 R201_U_LedMatrixPixel26 R201_U_LedMatrixPixel27 R201_U_LedMatrixPixel28 R201_U_LedMatrixPixel29 R201_U_LedMatrixPixel30 R201_U_LedMatrixPixel31 R201_U_LedMatrixPixel32 R201_U_LedMatrixPixel33 R201_U_LedMatrixPixel34 R201_U_LedMatrixPixel35 R201_U_LedMatrixPixel36 R201_U_LedMatrixPixel37 R201_U_LedMatrixPixel38 R201_U_LedMatrixPixel39 R201_U_LedMatrixPixel40 R201_U_LedMatrixPixel41 R201_U_LedMatrixPixel42 R201_U_LedMatrixPixel43 R201_U_LedMatrixPixel44 R201_U_LedMatrixPixel45 R201_U_LedMatrixPixel46 R201_U_LedMatrixPixel47 R201_U_LedMatrixPixel48 R201_U_LedMatrixPixel49: library part "Resistor 100"
U100: "48MHz 32bit ARM MCU", Flash size=16kB, RAM size=4kB
U101 U102: library part SN74LV1T32, Manufacturer_Name="Texas Instruments", Manufacturer_Part_Number=SN74LV1T32DCKR, Datasheet Link=http://www.ti.com/lit/ds/symlink/sn74lv1t32.pdf, Mouser2 Price/Stock=https://hu.mouser.com/Search/Refine?Keyword=SN74LV1T32DCKR, Mouser code=595-SN74LV1T32DCKR
U200_U_LedMatrixPixel1 U200_U_LedMatrixPixel2 U200_U_LedMatrixPixel3 U200_U_LedMatrixPixel4 U200_U_LedMatrixPixel5 U200_U_LedMatrixPixel6 U200_U_LedMatrixPixel7 U200_U_LedMatrixPixel8 U200_U_LedMatrixPixel9 U200_U_LedMatrixPixel10 U200_U_LedMatrixPixel11 U200_U_LedMatrixPixel12 U200_U_LedMatrixPixel13 U200_U_LedMatrixPixel14 U200_U_LedMatrixPixel15 U200_U_LedMatrixPixel16 U200_U_LedMatrixPixel17 U200_U_LedMatrixPixel18 U200_U_LedMatrixPixel19 U200_U_LedMatrixPixel20 U200_U_LedMatrixPixel21 U200_U_LedMatrixPixel22 U200_U_LedMatrixPixel23 U200_U_LedMatrixPixel24 U200_U_LedMatrixPixel25 U200_U_LedMatrixPixel26 U200_U_LedMatrixPixel27 U200_U_LedMatrixPixel28 U200_U_LedMatrixPixel29 U200_U_LedMatrixPixel30 U200_U_LedMatrixPixel31 U200_U_LedMatrixPixel32 U200_U_LedMatrixPixel33 U200_U_LedMatrixPixel34 U200_U_LedMatrixPixel35 U200_U_LedMatrixPixel36 U200_U_LedMatrixPixel37 U200_U_LedMatrixPixel38 U200_U_LedMatrixPixel39 U200_U_LedMatrixPixel40 U200_U_LedMatrixPixel41 U200_U_LedMatrixPixel42 U200_U_LedMatrixPixel43 U200_U_LedMatrixPixel44 U200_U_LedMatrixPixel45 U200_U_LedMatrixPixel46 U200_U_LedMatrixPixel47 U200_U_LedMatrixPixel48 U200_U_LedMatrixPixel49: "RGB LED"
J101: Datasheet=/Robotics%20Platform/Datasheets/Connectors/5721-8P8C-????.pdf

## Free pads (board coordinates)
  round 1.524 hole 2: 2(5.1,51) 3(30.006,51) 4(2,1.81) 4(33.93,1.81)

## Via types
v1: diameter 0.6, hole 0.3, Top Layer to Bottom Layer, tented both sides, 255 vias
v2: diameter 0.5, hole 0.2, Top Layer to Bottom Layer, tented both sides, 4 vias

## Nets (pads, with @x,y where several pads share a name; then routed paths per layer and width w, separated by ;. In a path a pad name is that pad's centre, name@x,y a point inside that pad or via, vN(x,y) a via of type N, cw(c..) or ccw(c..) an arc to the next point about the centre after c; other vN are vias at no path point)
3V3: C100.2 C104.2 C105.2 J100.1 J101.3 R100.2 R102.2 R103.2 U100.8 U100.23 | length 49.3
  Top Layer w0.4: J101.3@19.87,9.975 20.959,8.886 23.499,8.886 24.992,10.379 26.75,10.379 ; v1(27.05,4.825) 27.05,10.079 26.75,10.379 ; v1(31.25,12.425) 27.504,12.425 26.75,11.671 26.75,10.379
  Bottom Layer w0.254: R103.2@15.35,14.798 16.131,15.579 20.046,15.579 R102.2@20.775,14.85 ; C104.2@30.156,4.35 30.206,4.4 U100.8@30.206,6.495 ; U100.23@30.206,10.295 30.206,12.22 C100.2@30.256,12.27 31.095,12.27 v1(31.25,12.425) 31.25,12.498 31.751,12.999 32.935,12.999 R100.2@34.056,14.12 34.81,13.366 34.81,11.69 34.661,11.541 34.541,11.541 33.95,10.95 J100.1@33.95,8.74
  Bottom Layer w0.4: R103.2@15.331,14.825 15.304,14.798 R103.2@15.35,14.798 ; J101.3@19.87,9.975 19.87,13.9 R102.2@20.795,14.825 20.775,14.845 R102.2@20.775,14.85 ; v1(27.05,4.825) 27.525,4.35 C105.2@28.456,4.35 C104.2@30.156,4.35